# Altium PCB HSB-Version1.PcbDoc
Units mm, origin at the board's own origin, x right, y up, seen from the top; angles counter-clockwise.
Board outline 56.26 x 45.25 mm, 2 copper layers (Top Layer, Bottom Layer); 30 components, 31 nets, 154 pads, 33 vias.
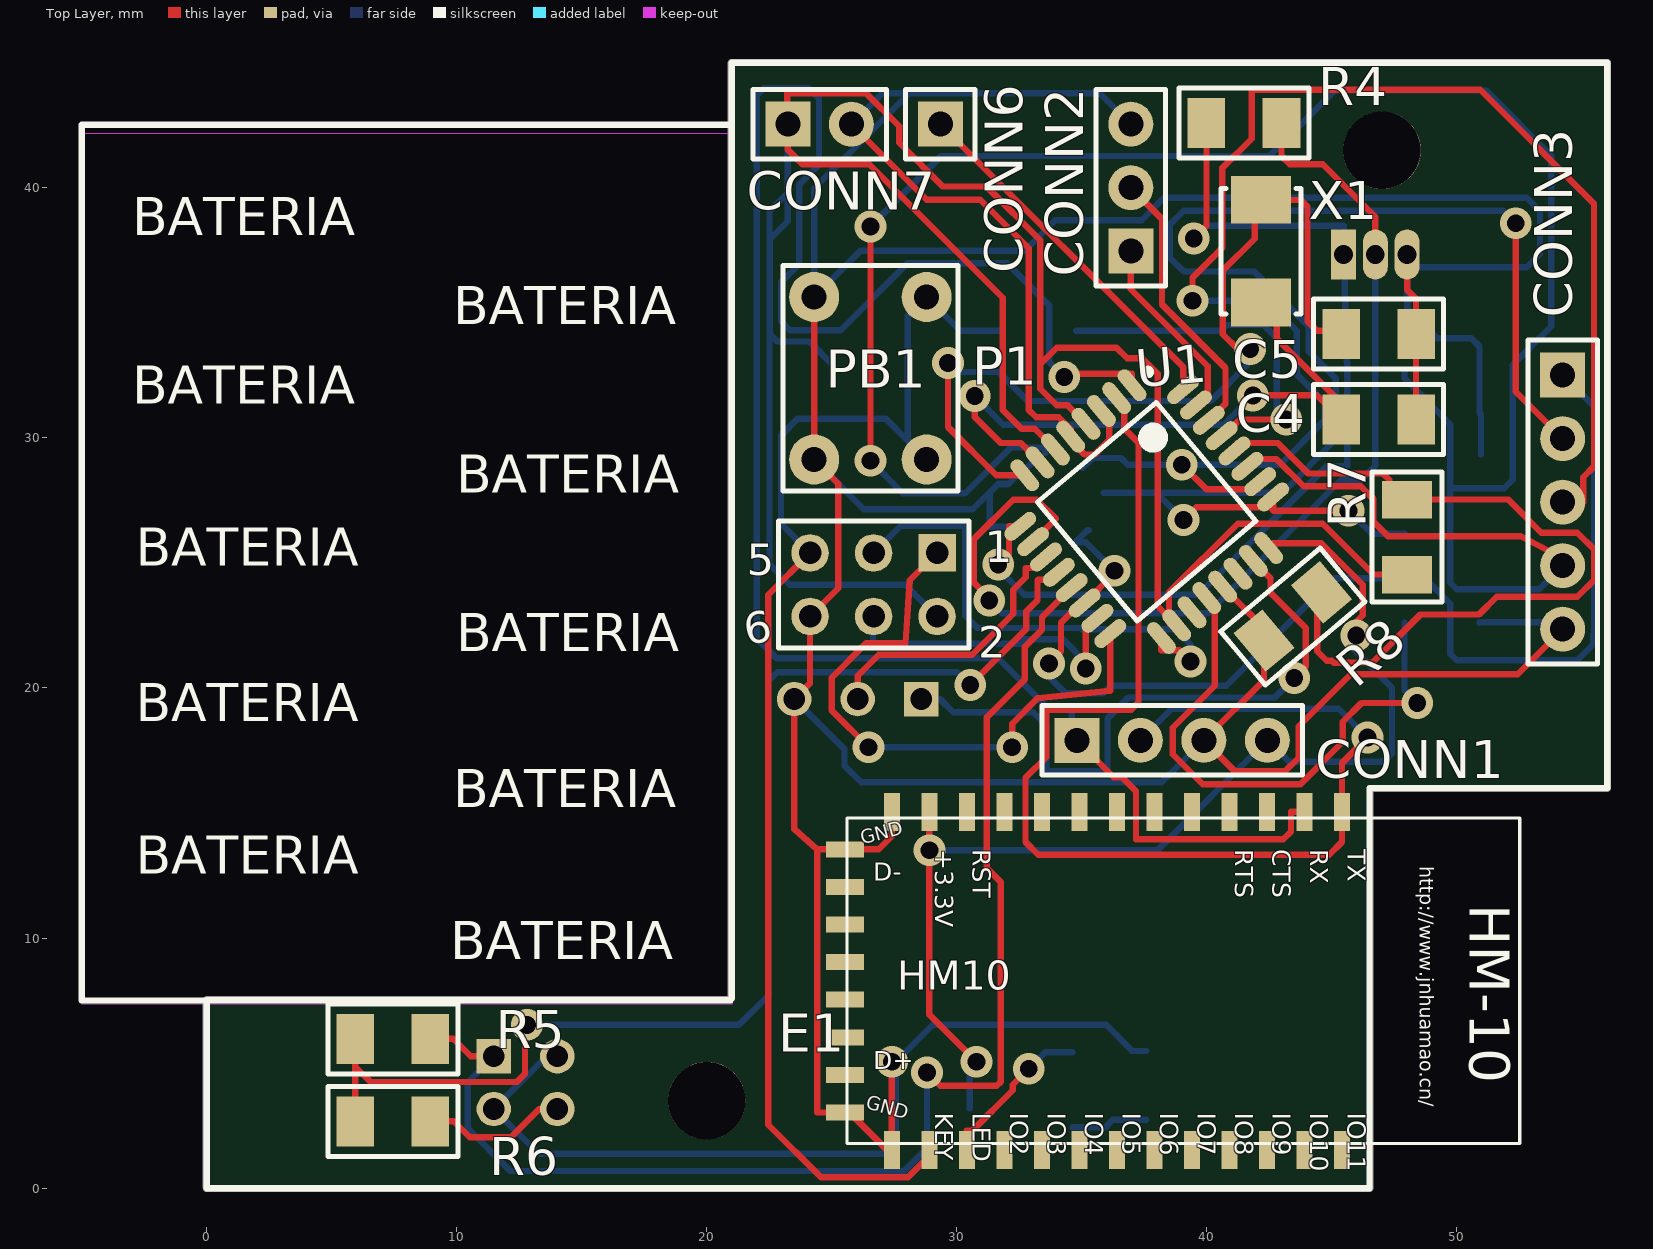
[diagram p0: Top Layer view]
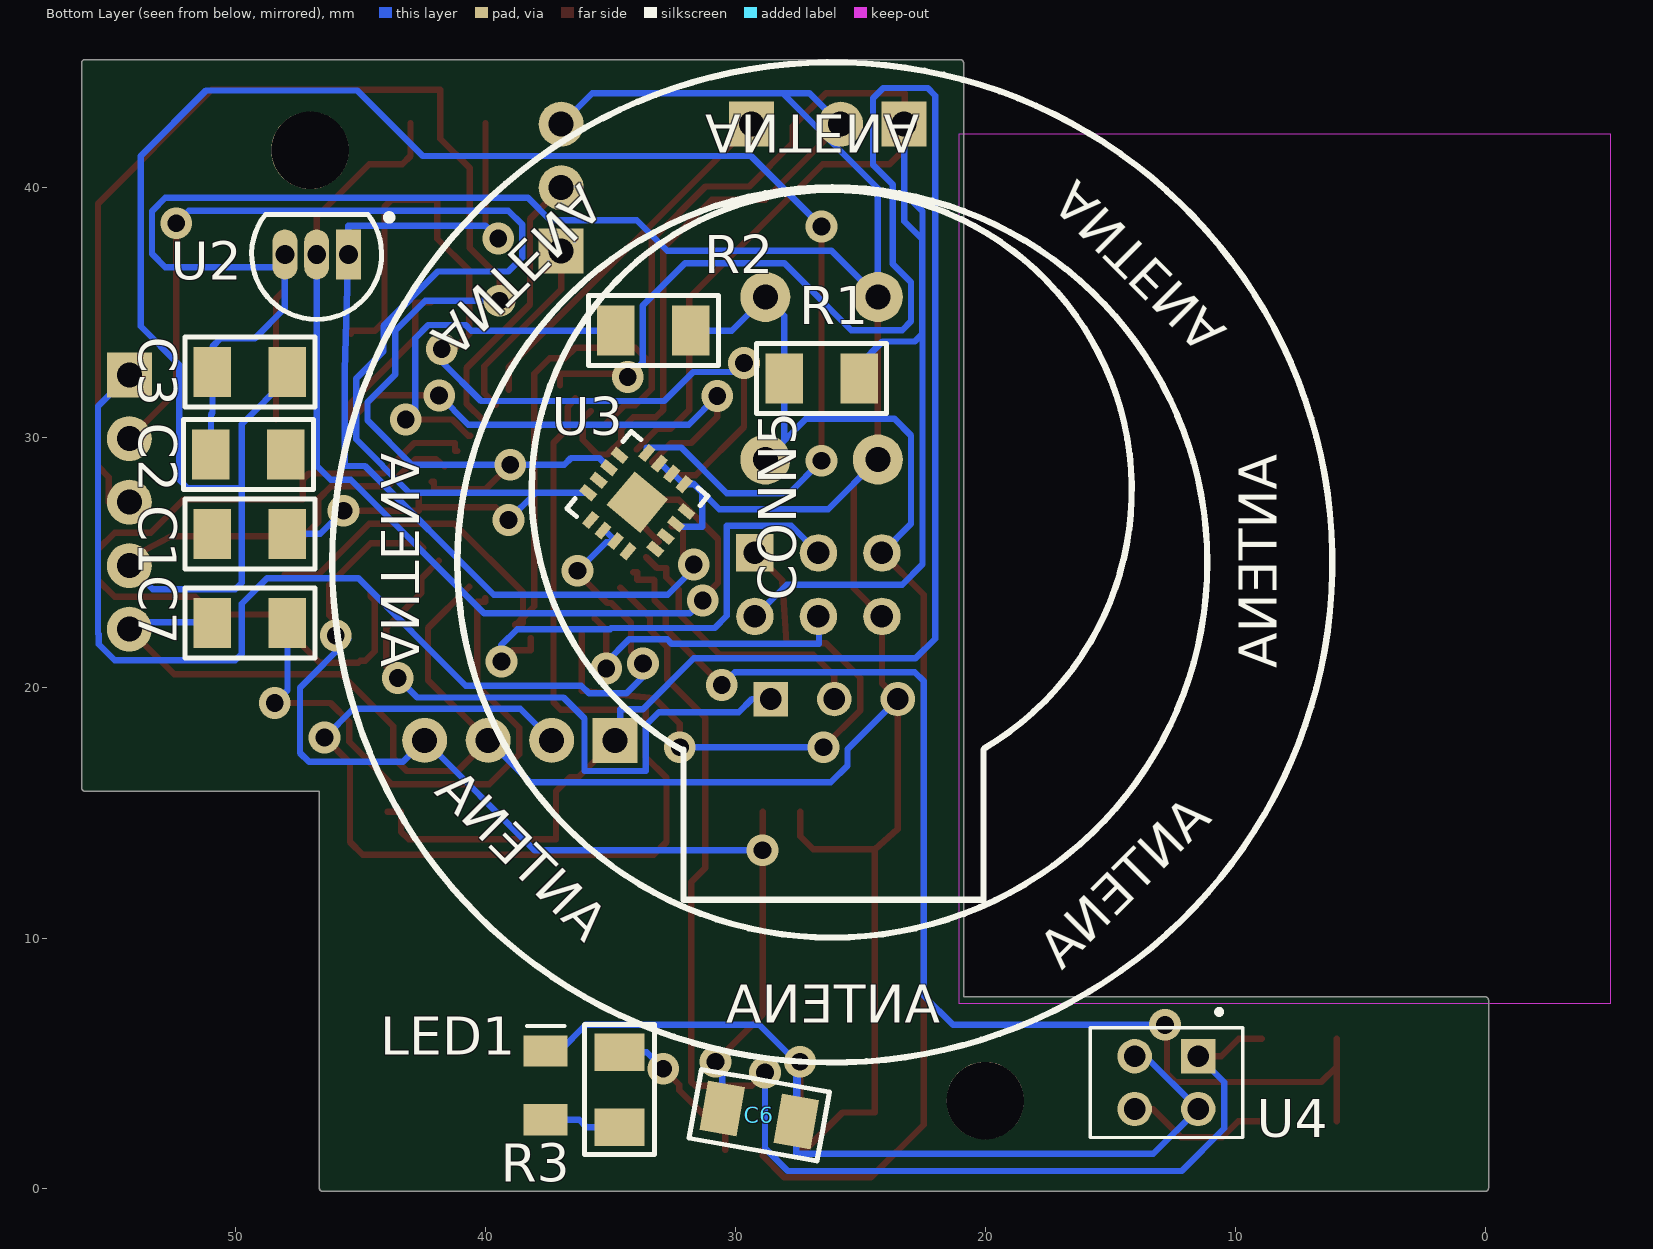
[diagram p1: Bottom Layer view, seen from below]
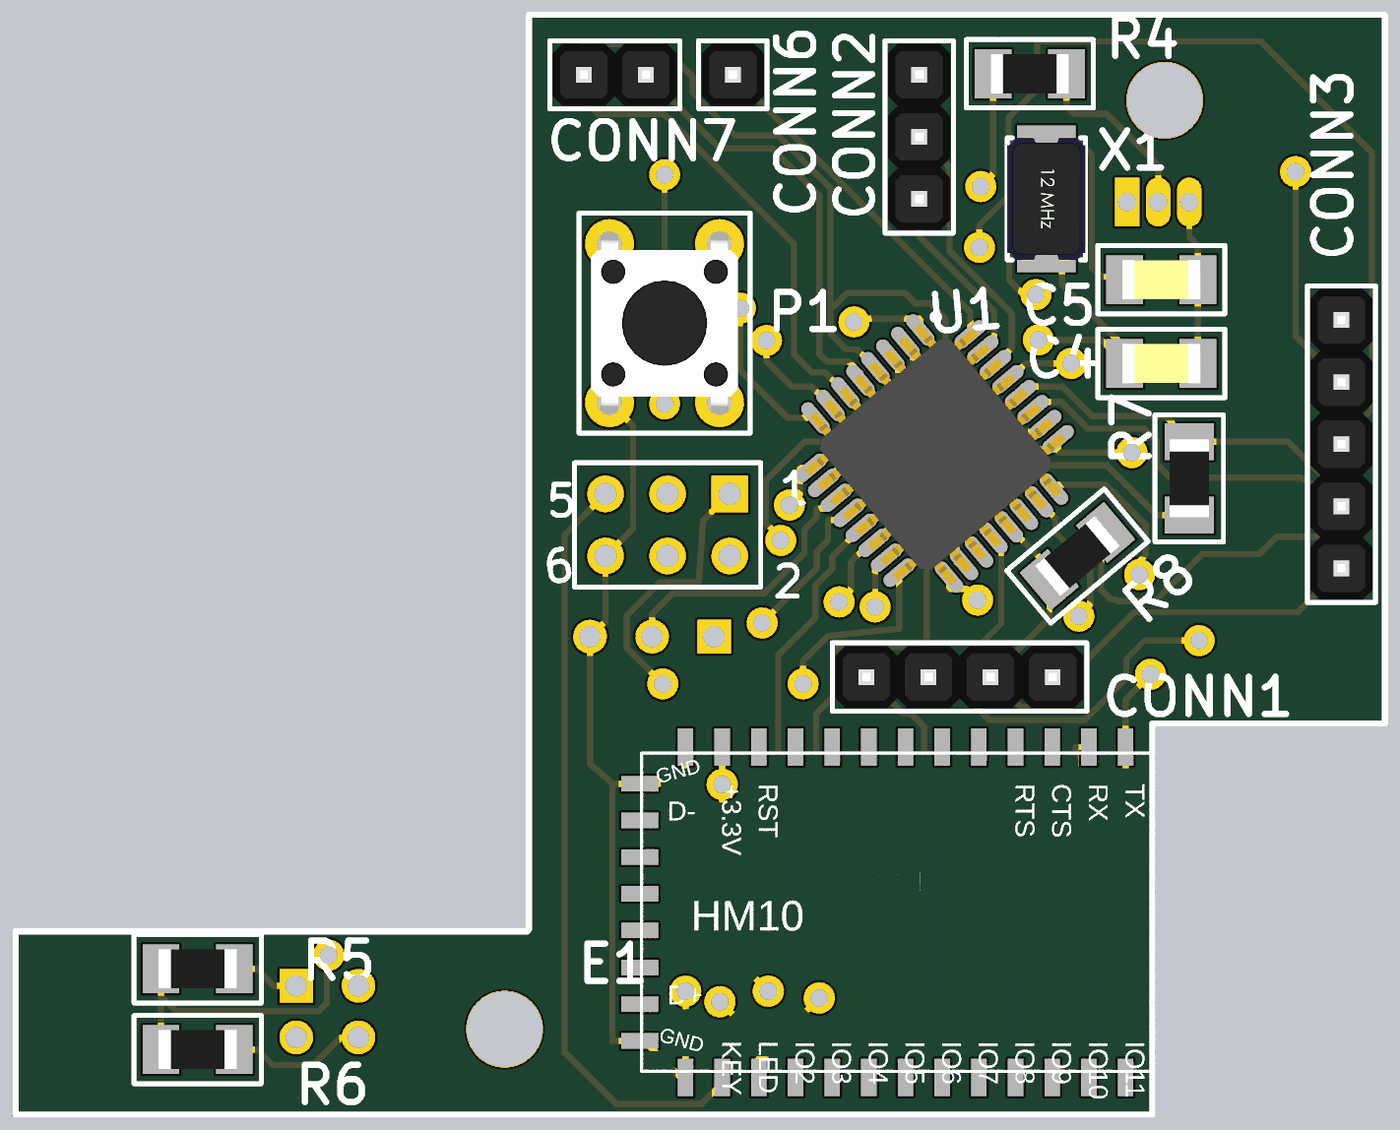
[diagram p2: 3D render of the assembled board from above, using the file's embedded part models]
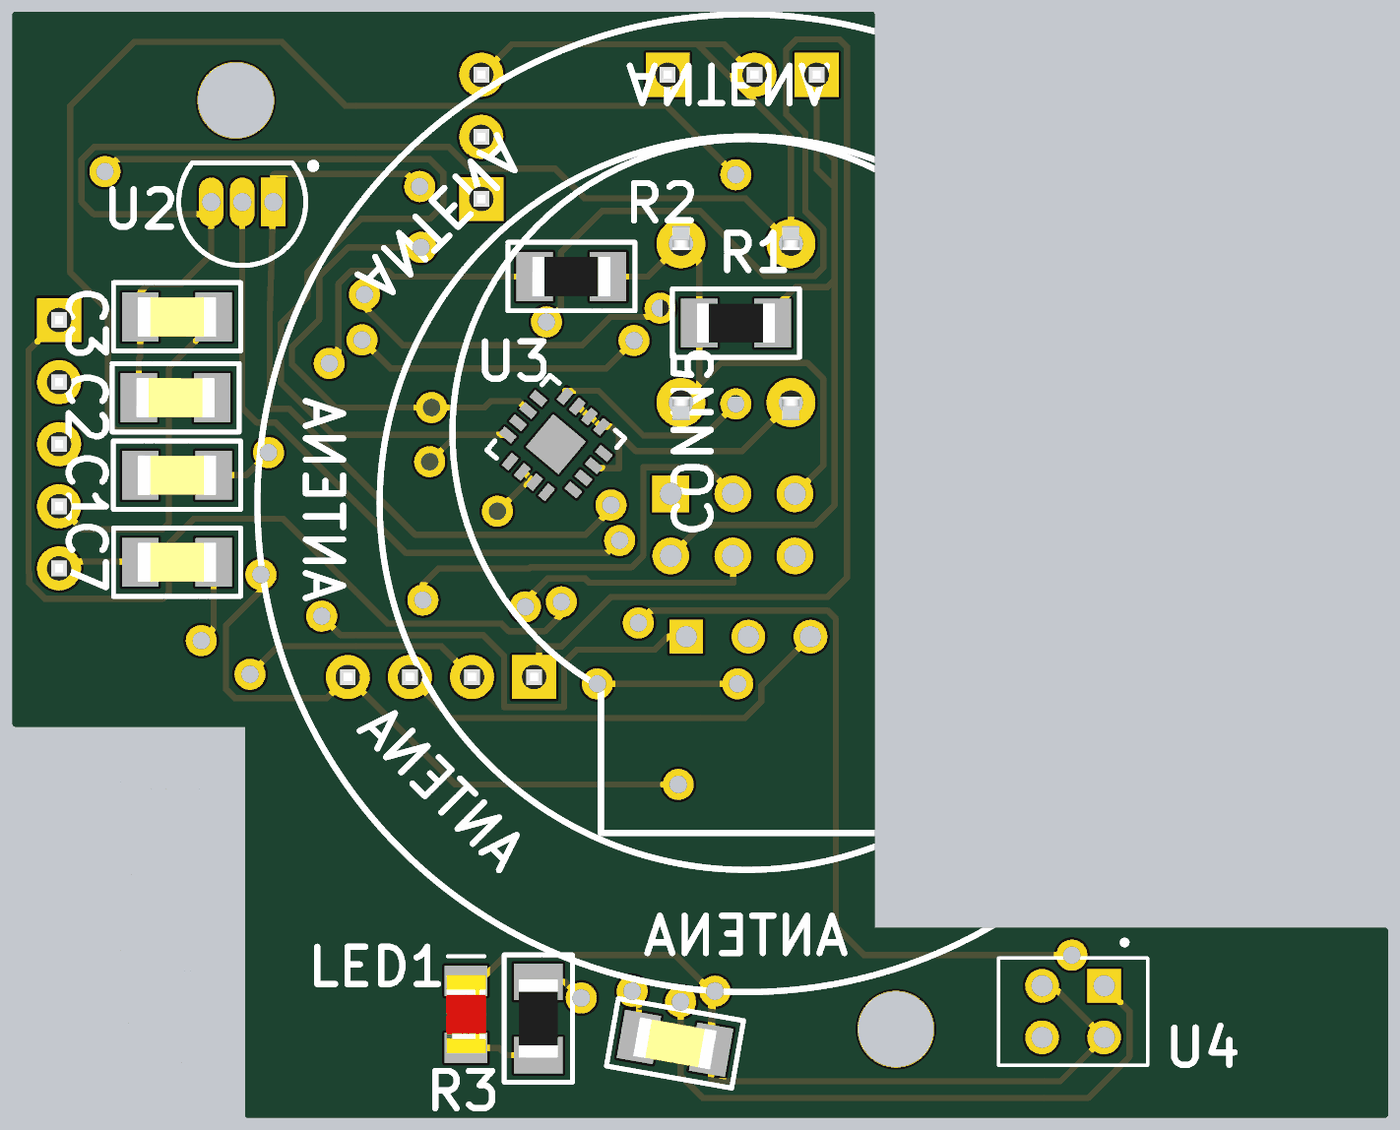
[diagram p3: 3D render of the assembled board from below, using the file's embedded part models]

## Layer stack, top to bottom
Top Solder: solder mask 0.0102, Solder Resist, Dk 3.5
Top Layer: signal copper 0.0356
Dielectric1: dielectric 0.32, FR-4, Dk 4.8
Bottom Layer: signal copper 0.0356
Bottom Solder: solder mask 0.0102, Solder Resist, Dk 3.5

## Board outline
-0.127,0 -0.127,7.519 cw(c0,7.519) 0,7.646 20.868,7.646 20.868,45 cw(c20.995,45) 20.995,45.127 56.007,45.127 cw(c56.007,45) 56.134,45 56.134,16.002 cw(c56.007,16.002) 56.007,15.875 46.627,15.875 46.627,0 cw(c46.5,0) 46.5,-0.127 0,-0.127 cw(c0,0)

## Design rules (kind name [scope] priority, off if disabled: settings)
Clearance [All] p1: gap=0.2 ignorepadtopadclearanceinfootprint=FALSE except(0: Arc-Hole Track-Hole SMDPad-Hole THPad-Hole Via-Hole Fill-Hole Poly-Hole Region-Hole Text-Hole)
PolygonConnect [All] p1: connectstyle=Relief reliefconductorwidth=0.254 reliefentries=4 polygonreliefangle="90 Angle" airgapwidth=0.254
RoutingVias [All] p1: holewidth=0.711 width=1.27 viastyle="Through Hole" minholewidth=0.711 minwidth=1.27 maxholewidth=0.711 maxwidth=1.27
SilkToSilkClearance [All] p1: silktosilkclearance=0.05
SilkToSolderMaskClearance [IsPad] p1: minsilkscreentomaskgap=0.125 clearancetoexposedcopper=TRUE
SolderMaskExpansion [All] p1: expansion=0.102
Width [All] p1: maxlimit=0.254 minlimit=0.254 preferedwidth=0.254
28 further rules are at their usual default settings.

## Classes and differential pairs
component class PPM: CONN5
component class SensorCaida: C1 C2 C3 CONN3 U3
component class Atmega328P: C4 C5 C7 CONN2 CONN6 P1 PB1 R1 R2 R7 R8 U1 X1
component class Temperatura: R4 U2
component class BLE-HM10: C6 CONN1 E1 LED1 R3
component class Proximidad: R5 R6 U4
component class CargaInalambrica: CONN7

## Components (designator, comment, footprint, x,y, rotation, side; value= is the part's Value field where it differs from the comment)
C1 "C" C1206-1.00 49.406,26.162 r0 bottom
C2 "C" C1206-1.00 49.463,29.334 r0 bottom
C3 "C" C1206-1.00 49.403,32.639 r0 bottom
C4 "C1" C1206-1.25 46.863,30.734 r180 top
C5 "C2" C1206-1.25 46.863,34.163 r180 top
C6 "C2" C1206-1.25 29.036,2.921 r10 bottom
C7 "C2" C1206-1.25 49.403,22.606 r180 bottom
CONN1 "Connector" "1x4x2.54 Pin Header TH V" 38.608,17.907 r0 top
CONN2 "Connector" "1x3x2.54 Pin Header TH V" 36.957,40.005 r90 top
CONN3 "Connector" "1x5x2.54 Pin Header TH V" 54.229,27.432 r270 top
CONN5 "Connector" SEN0203 18.796,14.224 r90 bottom
CONN6 "Connector" "1x1x2.54 Pin Header TH V" 29.337,42.545 r90 top
CONN7 "Connector" "1x2x2.54 Pin Header TH V" 24.511,42.545 r0 top
E1 "HM Bluetooth module use TI CC2540 or CC2541, Master and slave roles in one, transmission version and remote control version and PIO state acquisition functions in one, Support the AT command modify module parameters, Convenient and flexible." 26.9X13X2.2_BOARD 45.402,7.544 r270 top
LED1 "LED" SMT1206-LED 37.581,4.108 r90 bottom
P1 "Header 3X2" HDR2X3 29.21,25.4 r180 top
PB1 "Push Button" "Tack Switch 6x6 1mm TH" 26.543,32.385 r270 top
R1 "R" R1206-0.55 26.543,32.385 r0 bottom
R2 "R" R1206-0.55 33.274,34.29 r180 bottom
R3 "R" R1206-0.55 34.624,3.937 r270 bottom
R4 "R" R1206-0.55 41.483,42.587 r180 top
R5 "R" R1206-0.55 7.446,5.969 r180 top
R6 "R" R1206-0.55 7.446,2.667 r180 top
R7 "R" R1206-0.55 48.006,26.035 r270 top
R8 "R" R1206-0.55 43.434,22.86 r40 top
U1 "ATMEGA328P-AU" TQFP80P900X900X120-32N 37.592,27.051 r310 top
U2 "LM35CAZ/NOPB" Z03A 46.736,37.338 r90 bottom
U3 "ADXL335" *LFCSP-16 33.909,27.432 r40 bottom
U4 "QRD1114" *ONS_QRD1114 12.653,4.318 r270 bottom
X1 "XTAL" 2-SMD 42.164,37.465 r270 top

## Footprints (in the part's own frame and the unit in brackets; to place one, negate y for a bottom-side part, rotate by r counter-clockwise, add the part's x,y. Pads: shape width x height; smd on the part's side, far side on the other; paste and mask are expansions set on the pad)
"1x1x2.54 Pin Header TH V" [mm] "1x1x2.54 Pin Header TH V"
  rect 1.8x1.8 hole 1: 1(0,0)
  silkscreen extent -1.4,-1.4 1.4,1.4, body extent -1.27,-1.27 1.27,1.27, height 8.55
"1x2x2.54 Pin Header TH V" [mm] "1x2x2.54 Pin Header TH V"
  rect 1.8x1.8 hole 1: 1(-1.27,0)
  round 1.8 hole 1: 2(1.27,0)
  silkscreen extent -2.67,-1.4 2.67,1.4, body extent -2.54,-1.27 2.54,1.27, height 8.55
"1x3x2.54 Pin Header TH V" [mm] "1x3x2.54 Pin Header TH V"
  rect 1.8x1.8 hole 1: 1(-2.54,0)
  round 1.8 hole 1: 2(0,0) 3(2.54,0)
  silkscreen extent -3.94,-1.4 3.94,1.4, body extent -3.81,-1.27 3.81,1.27, height 8.55
"1x4x2.54 Pin Header TH V" [mm] "1x4x2.54 Pin Header TH V"
  rect 1.8x1.8 hole 1: 1(-3.81,0)
  round 1.8 hole 1: 2(-1.27,0) 3(1.27,0) 4(3.81,0)
  silkscreen extent -5.21,-1.4 5.21,1.4, body extent -5.08,-1.27 5.08,1.27, height 8.55
"1x5x2.54 Pin Header TH V" [mm] "1x5x2.54 Pin Header TH V"
  rect 1.8x1.8 hole 1: 1(-5.08,0)
  round 1.8 hole 1: 2(-2.54,0) 3(0,0) 4(2.54,0) 5(5.08,0)
  silkscreen extent -6.48,-1.4 6.48,1.4, body extent -6.35,-1.27 6.35,1.27, height 8.55
2-SMD [mm] "2-SMD"
  rect 1.9x2.4 smd: 1(-2.05,0) 2(2.05,0)
  silkscreen extent -2.5,-1.6 2.5,1.6, body extent -2.51,-1.6 2.51,1.6, height 1.05
26.9X13X2.2_BOARD [mil]
  rect 60x25 smd: 1(-295.28,0) 2(-295.28,-59.05) 3(-295.28,-118.11) 4(-295.28,-177.16) 5(-295.28,-236.22) 6(-295.28,-295.27) 8(-295.28,-413.39) 9(-295.28,-472.44) 10(-295.28,-531.5) 11(-295.28,-590.55) 12(-295.28,-649.61) 13(-295.28,-708.66) 22(237,-708.66) 23(237,-649.61) 24(237,-590.55) 25(237,-531.5) 26(237,-472.44) 27(237,-413.39) 28(237,-354.33) 29(237,-295.27) 30(237,-236.22) 31(237,-177.16) 32(237,-118.11) 33(237,-59.05) 34(237,0) $7(-295.28,-354.33)
  rect 25x60 smd: 14(-236.22,-782.48) 15(-177.17,-782.48) 16(-118.11,-782.48) 17(-59.06,-782.48) 18(0,-782.48) 19(60,-782.48) 20(119,-782.48) 21(178,-782.48)
  silkscreen extent -285,-780 227,280, body extent -286,-785 226,274, height 61
*LFCSP-16 [mm]
  rect 1.75x1.75 smd: 0(0,0)
  rect 0.65x0.37 smd: 1(-1.75,0.975) 2(-1.75,0.325) 3(-1.75,-0.325) 4(-1.75,-0.975) 9(1.75,-0.975) 10(1.75,-0.325) 11(1.75,0.325) 12(1.75,0.975)
  rect 0.37x0.65 smd: 5(-0.975,-1.75) 6(-0.325,-1.75) 7(0.325,-1.75) 8(0.975,-1.75) 13(0.975,1.75) 14(0.325,1.75) 15(-0.325,1.75) 16(-0.975,1.75)
  silkscreen extent -2,-2 2,2
*ONS_QRD1114 [mm]
  rect 1.378x1.378 hole 0.87: 1(-0.955,1.17)
  round 1.378 hole 0.87: 2(-0.955,-1.37) 3(1.155,-1.37) 4(1.155,1.17)
  silkscreen extent -2.83,-3.15 2.29,2.95
C1206-1.00 [mm] "Capacitor Chip 1206 Height 1.00mm"
  rect 1.5x2 smd: 1(-1.5,0) 2(1.5,0)
  silkscreen extent -2.6,-1.4 2.6,1.4, body extent -1.6,-0.81 1.6,0.81, height 1.01
C1206-1.25 [mm] "Capacitor Chip 1206 Height 1.25mm"
  rect 1.5x2 smd: 1(-1.5,0) 2(1.5,0)
  silkscreen extent -2.6,-1.4 2.6,1.4, body extent -1.6,-0.81 1.6,0.81, height 1.26
HDR2X3 [mm] "Connector; Header; 3x2 Position"
  rect 1.5x1.5 hole 0.9: 1(0,0)
  round 1.5 hole 0.9: 2(0,2.54) 3(2.54,0) 4(2.54,2.54) 5(5.08,0) 6(5.08,2.54)
  silkscreen extent -1.27,-1.27 6.35,3.81
R1206-0.55 [mm] "Resistor Chip 1206 Height 0.55mm"
  rect 1.5x2 smd: 1(-1.5,0) 2(1.5,0)
  silkscreen extent -2.6,-1.4 2.6,1.4, body extent -1.6,-0.8 1.6,0.8, height 0.56
SEN0203 [mil] "Sensor PPM"
  rect 54.25x54.25 hole 34.25: 1(210,385)
  round 54.25 hole 34.25: 2(210,285) 3(210,185)
  silkscreen extent -106,-183 1012,762
SMT1206-LED [mm]
  rect 1.25x1.75 smd: 1(-1.375,0) 2(1.375,0)
  silkscreen extent 2.37,-0.75 2.37,0.75, body extent -1.6,-0.8 1.6,0.8, height 1.78
"Tack Switch 6x6 1mm TH" [mm] "Tack Switch 6x6mm, 1mm button height TH"
  round 2 hole 1: 1(-3.25,2.25) 1(3.25,2.25) 2(-3.25,-2.25) 2(3.25,-2.25)
  silkscreen extent -4.5,-3.5 4.5,3.5, body extent -3.98,-3 3.98,3, height 4.41
TQFP80P900X900X120-32N [mm] "TQFP, 32-Leads, Body 7.00x7.00mm, Pitch 0.80mm, IPC Medium Density"
  oval 1.5x0.55 smd: 1(-4.25,2.8) 2(-4.25,2) 3(-4.25,1.2) 4(-4.25,0.4) 5(-4.25,-0.4) 6(-4.25,-1.2) 7(-4.25,-2) 8(-4.25,-2.8) 17(4.25,-2.8) 18(4.25,-2) 19(4.25,-1.2) 20(4.191,-0.381) 21(4.25,0.4) 22(4.25,1.2) 23(4.25,2) 24(4.25,2.8)
  oval 0.55x1.5 smd: 9(-2.8,-4.25) 10(-2,-4.25) 11(-1.2,-4.25) 12(-0.4,-4.25) 13(0.4,-4.25) 14(1.2,-4.25) 15(2,-4.25) 16(2.8,-4.25) 25(2.8,4.25) 26(2,4.25) 27(1.2,4.25) 28(0.4,4.25) 29(-0.4,4.25) 30(-1.2,4.25) 31(-2,4.25) 32(-2.8,4.25)
  silkscreen extent -4.37,-3.1 3.1,3.75, body extent -4.45,-4.5 4.55,4.5, height 1.6
Z03A [mm] "TO, Flat Index; 3 In-Line, Axial Leads; Body Dia. 5mm; Leads 0.55 x 0.50 mm (max)"
  rect 2x1 hole 0.75: 1(0,-1.27)
  oval 2x1 hole 0.75: 2(0,0) 3(0,1.27)
  silkscreen extent -2.6,-3.02 1.6,2.6, body extent -2.6,-2.61 1.6,2.61, height 5.2

## Part data
C1 C2 C3: "Capacitor, generic"
C4 C5 C6 C7: library part C, "Capacitor, generic"
CONN1: library part "Header 1x4"
CONN2 CONN5: library part "Header 1x3"
CONN3: library part "Header 1x5"
CONN6: library part "Header 1x1"
CONN7: library part "Header 1x2"
E1: library part HM-10-BOARD
LED1: "*"
P1: "Header, 3-Pin, Dual row"
R1 R2 R3 R4 R5 R6 R7 R8: "Resistor, generic"
U1: "Microchip Technology ATMEGA328P-AN, 8bit AVR Microcontroller, 20MHz, 32 kB Flash, 32-Pin TQFP"
U2: "Precision Centigrade Temperature Sensor, 3-pin TO-92, Pb-Free"
U3: "Acelerómetro X, Y, Eje Z ± 3g 1.6kHz _X, Y_, 550Hz _Z_ 16-LFCSP-LQ _4x4_"
U4: "Sensor óptico reflectante 0.050 _1.27 mm_ radial - 4 conductores"
X1: "Crystal, Generic"

## Free pads (board coordinates)
  round 3.1 hole 3.1: 0(20,3.5) 1(47,41.5)

## Via types
v1: diameter 1.27, hole 0.711, Top Layer to Bottom Layer, 33 vias

## Nets (pads, with @x,y where several pads share a name; then routed paths per layer and width w, separated by ;. In a path a pad name is that pad's centre, name@x,y a point inside that pad or via, vN(x,y) a via of type N, cw(c..) or ccw(c..) an arc to the next point about the centre after c; other vN are vias at no path point)
3.3V: CONN7.1 P1.2 R1.1 R7.2 U1.4 U1.6 U1.18 | length 105.7
  Top Layer w0.254: U1.6 33.109,30.368 32.584,30.368 31.836,31.115 31.836,35.604 26.496,40.945 23.829,40.945 23.241,41.533 CONN7.1 23.219,42.545 23.219,43.79 26.369,43.79 27.69,42.469 27.69,41.801 29.44,40.051 31.186,40.051 33.329,37.909 33.329,32.949 ; U1.4 34.423,31.307 33.989,31.307 33.329,31.967 33.329,32.949 ; R7.2 46.666,24.535 44.632,26.568 41.228,26.568 38.485,23.825 U1.18@38.485,22.817 ; 33.329,32.949 33.989,33.609 36.384,33.609 36.808,33.186 37.414,33.186 38.028,32.572 38.028,23.274 U1.18@38.485,22.817 ; U1.18@38.485,22.817 38.485,22.606 38.536,22.555 U1.18@38.746,22.555 ; U1.18@38.485,22.817 U1.18@38.746,22.555 ; U1.18@38.746,22.555 38.792,22.555 U1.18 U1.18@38.746,22.555
  Bottom Layer w0.254: CONN7.1 23.241,39.798 ; R1.1 25.043,32.918 24.108,33.854 22.813,33.854 22.512,34.155 22.512,37.942 23.241,38.671 23.241,39.798 ; P1.2 27.94,24.13 23.321,24.13 22.508,24.943 22.508,39.065 23.241,39.798
A0: CONN5.1 U1.23 | length 25.7
  Top Layer w0.254: U1.23 42.545,24.392 42.545,23.804 43.952,22.396 43.952,20.86 v1(43.489,20.396)
  Bottom Layer w0.254: CONN5.1 29.326,19.558 29.856,19.028 33.048,19.028 33.571,18.505 33.571,16.68 36.025,16.68 36.025,18.778 36.867,19.62 42.712,19.62 v1(43.489,20.396)
A1: C6.2 CONN1.4 E1.12 U1.24 | length 46.9
  Top Layer w0.254: E1.12 v1(28.902,13.513) 28.902,6.941 v1(30.789,5.055) ; U1.24 42.655,25.781 44.577,25.781 46.228,24.13 46.228,22.907 45.466,22.145 45.513,22.098 v1(45.974,22.098)
  Bottom Layer w0.254: v1(28.902,13.513) 38.024,13.513 CONN1.4 43.282,17.043 47.045,17.043 47.4,17.399 47.4,20.015 45.466,21.949 45.615,22.098 v1(45.974,22.098) ; C6.2 30.513,4.779 v1(30.789,5.055)
A2: C1.1 CONN3.2 U1.25 U3.12 | length 58.4
  Top Layer w0.254: v1(39.069,26.716) 39.577,27.224 42.648,27.224 ; U1.25 42.648,27.224 ; v1(45.66,27.089) 42.648,27.089 42.648,27.224 ; v1(52.353,38.583) 52.353,31.848 CONN3.2
  Bottom Layer w0.254: U3.12 37.975,27.81 ; v1(39.069,26.716) 37.975,27.81 ; v1(45.66,27.089) 46.587,26.162 C1.1 ; v1(52.353,38.583) 51.845,39.091 39.069,39.091 38.51,38.532 38.51,37.211 39.069,36.652 41.888,36.652 44.065,34.476 44.065,33.472 45.159,32.379 45.159,29.943 43.026,27.81 37.975,27.81
A3: CONN3.3 U1.26 U3.10 | length 61.2
  Top Layer w0.254: v1(38.993,28.931) 39.983,27.94 42.041,27.94 42.041,28.251 U1.26 ; v1(39.425,35.484) 39.425,36.398 40.618,37.592 40.618,40.792 41.787,41.961 41.787,43.917 50.931,43.917 55.477,39.37 55.477,28.854 55.046,28.423 55.046,27.432 CONN3.3
  Bottom Layer w0.254: U3.10 35.433,29.198 36.564,29.198 36.83,28.932 36.83,28.931 v1(38.993,28.931) 42.93,28.931 44.705,30.705 44.705,31.423 43.59,32.537 43.59,34.29 42.396,35.484 v1(39.425,35.484)
A4: C3.1 CONN3.4 U1.27 U3.8 | length 93.8
  Top Layer w0.254: v1(26.547,29.083) v1(26.547,38.456) ; U1.27 41.971,29.159 42.777,29.159 43.87,28.067 46.156,28.067 46.664,27.559 46.664,26.645 47.241,26.067 52.548,26.067 53.619,25.502 CONN3.4
  Bottom Layer w0.254: v1(26.547,29.083) 27.842,27.788 30.331,27.788 32.16,29.616 33.531,29.616 U3.8 ; v1(26.547,38.456) 29.366,41.275 42.498,41.275 45.114,43.891 51.159,43.891 53.776,41.275 53.776,34.468 52.226,32.918 52.226,28.321 51.896,27.991 49.737,27.991 ; C3.1 47.903,32.385 49.737,30.551 49.737,27.991 ; CONN3.4 53.289,23.952 49.991,23.952 49.737,24.206 49.737,27.991
A5: R7.1 R8.2 U1.28 | length 33.2
  Top Layer w0.254: U1.28 41.203,29.476 41.203,29.794 42.829,29.794 44.048,28.575 47.045,28.575 47.299,28.321 47.299,27.535 R7.1 52.047,27.535 53.377,26.205 54.817,26.205 55.477,25.545 55.477,24.308 54.817,23.647 51.591,23.647 50.88,22.936 48.543,22.936 46.616,21.009 45.068,21.009 44.995,21.082 44.787,21.082 44.406,21.463 44.406,23.496 44.583,23.673 R8.2
AREF: C7.2 U1.20 | length 22.8
  Top Layer w0.254: U1.20 39.994,23.444 40.314,23.444 40.314,20.091 38.637,18.415 38.637,17.348 39.831,16.154 43.743,16.154 45.432,17.843 45.432,18.648 46.181,19.397 v1(48.411,19.397)
  Bottom Layer w0.254: C7.2 47.903,19.905 v1(48.411,19.397)
C_BAT: CONN6.1 U1.32 | length 14.6
  Top Layer w0.254: CONN6.1 39.048,32.834 U1.32
D0: CONN2.2 U1.30 | length 11.1
  Top Layer w0.254: CONN2.2 38.205,38.757 38.205,35.336 40.745,32.796 40.745,31.371 U1.30
D1: CONN2.1 U1.31 | length 7.6
  Top Layer w0.254: CONN2.1 36.957,35.943 40.034,32.865 40.034,31.787 U1.31
D3: CONN1.1 E1.2 U1.1 | length 81
  Top Layer w0.254: v1(34.294,32.436) 34.421,32.563 37.005,32.563 U1.1 ; CONN1.1 36.271,16.434 36.605,16.434 37.164,15.875 37.164,13.945 43.057,13.945 43.362,14.249 43.362,15.044 E1.2
  Bottom Layer w0.254: v1(34.294,32.436) 33.697,33.033 33.697,35.293 32.008,36.982 28.027,36.982 25.353,34.308 23.321,34.308 22.966,34.663 22.966,36.221 23.702,36.957 23.702,40.132 24.489,40.919 24.489,43.586 24.083,43.993 22.305,43.993 22,43.688 22,21.971 22.788,21.184 31.652,21.184 33.684,19.152 34.599,19.152 34.599,18.106 CONN1.1
D4: CONN1.2 E1.1 U1.2 | length 49.7
  Top Layer w0.254: U1.2 36.698,31.228 36.698,30.378 37.266,29.81 37.266,19.431 36.969,19.134 33.571,19.134 33.571,17.235 32.744,16.408 32.744,13.843 33.252,13.335 44.894,13.335 45.402,13.843 E1.1 45.402,17.001 v1(46.418,18.017)
  Bottom Layer w0.254: CONN1.2 38.597,19.166 45.269,19.166 v1(46.418,18.017)
D5: R4.2 U1.9 U2.1 | length 39.5
  Top Layer w0.254: v1(31.652,24.943) 32.084,25.375 32.084,26.464 U1.9 ; v1(39.475,37.973) 39.983,38.481 R4.2
  Bottom Layer w0.254: v1(31.652,24.943) 31.652,24.765 32.694,23.724 39.647,23.724 44.801,28.877 45.613,28.877 45.613,32.686 U2.1 45.466,38.481 39.983,38.481 v1(39.475,37.973)
D6: R4.1 U1.10 U2.2 | length 42.4
  Top Layer w0.254: v1(31.297,23.495) 31.297,23.597 30.687,24.206 30.687,25.959 32.262,27.534 33.194,27.534 33.964,26.764 U1.10 ; R4.1 42.983,41.275 43.313,40.945 44.632,40.945 46.736,38.84 U2.2
  Bottom Layer w0.254: v1(31.297,23.495) 31.805,22.987 40.041,22.987 45.378,28.324 46.166,28.324 46.736,28.894 U2.2
D7: CONN5.2 U1.11 | length 11.2
  Top Layer w0.254: CONN5.2 26.035,20.494 26.87,21.329 30.615,21.329 32.259,22.973 32.259,23.932 32.752,24.426 32.752,24.8 33.126,24.8 U1.11
D8: R5.2 R6.2 U1.12 | length 50.1
  Top Layer w0.254: R6.2 5.946,4.853 ; R5.2 5.946,4.853 ; v1(12.805,6.528) 12.729,6.452 12.729,4.572 12.399,4.242 6.557,4.242 5.946,4.853 ; v1(30.535,20.117) 32.776,22.358 32.776,23.057 33.227,23.508 33.227,24.308 33.252,24.333 33.913,24.333 33.913,24.626 U1.12
  Bottom Layer w0.254: v1(12.805,6.528) 21.289,6.528 22.457,7.696 22.457,20.278 22.813,20.634 30.018,20.634 v1(30.535,20.117)
D9: R5.1 U1.13 U4.1 | length 53.3
  Top Layer w0.254: R5.1 9.859,5.969 10.555,5.273 U4.1 ; v1(28.807,4.623) 29.341,4.089 31.601,4.089 31.754,4.242 31.754,12.243 31.197,12.799 31.197,18.818 32.719,20.34 32.719,21.641 33.405,22.327 33.405,22.835 34.583,24.013 U1.13
  Bottom Layer w0.254: U4.1 10.443,4.233 10.443,2.388 12.145,0.686 27.893,0.686 28.807,1.6 v1(28.807,4.623)
D10: CONN3.1 U1.14 U3.14 U3.15 | length 46.2
  Top Layer w0.254: v1(33.684,20.98) 34.167,21.463 34.167,22.606 34.961,23.4 U1.14 36.3,24.593 v1(36.3,24.689)
  Bottom Layer w0.254: v1(33.684,20.98) 33.684,20.447 34.345,19.787 35.843,19.787 36.148,20.091 40.771,20.091 45.063,24.384 48.721,24.384 49.737,23.368 49.737,21.361 49.991,21.107 54.817,21.107 55.452,21.742 55.452,22.149 55.477,22.174 55.477,31.264 CONN3.1 ; U3.14 35.22,26.3 34.802,25.882 U3.15 34.785,25.832 35.157,25.832 v1(36.3,24.689)
D11: P1.4 U1.15 | length 12.5
  Top Layer w0.254: v1(35.157,20.777) 35.157,22.323 U1.15
  Bottom Layer w0.254: P1.4 26.648,22.86 26.648,21.768 32.544,21.768 32.719,21.942 34.243,21.942 35.157,21.028 v1(35.157,20.777)
D12: P1.1 U1.16 | length 24.3
  Top Layer w0.254: v1(26.471,17.628) 24.997,19.101 24.997,20.411 26.369,21.783 27.944,21.783 28.122,24.312 P1.1 ; v1(32.211,17.628) 32.211,18.572 33.227,19.588 36.136,19.887 U1.16
  Bottom Layer w0.254: v1(26.471,17.628) v1(32.211,17.628)
D13: P1.3 U1.17 | length 19.7
  Top Layer w0.254: U1.17 38.179,21.514 38.891,21.514 v1(39.348,21.057)
  Bottom Layer w0.254: P1.3 27.762,26.492 30.331,26.492 30.331,22.885 30.82,22.396 34.949,22.396 34.993,22.352 38.713,22.352 39.348,21.717 v1(39.348,21.057)
GND: C2.2 C3.2 C4.1 C5.1 C6.1 C7.1 CONN1.3 CONN2.3 CONN3.5 CONN5.3 CONN7.2 E1.13 E1.14 E1.21 E1.22 LED1.2 P1.6 PB1.2 R8.1 U1.3 U1.5 U1.21 U2.3 U3.3 U3.5 U3.6 U3.7 U4.2 U4.4 | length 242.9
  Top Layer w0.254: PB1.2@24.293,35.635 24.293,29.135 25.257,28.171 25.257,23.987 P1.6 24.13,20.193 CONN5.3 23.495,14.355 24.413,13.544 ; CONN7.2 28.797,39.529 30.936,39.529 32.875,37.59 32.875,31.115 33.168,30.822 34.079,30.822 34.554,30.347 U1.5 34.554,29.89 35.107,29.337 35.513,29.337 36.097,29.921 36.097,30.76 U1.3 ; v1(27.402,5.055) E1.22 27.207,1.524 25.709,3.023 E1.21 24.413,3.023 24.413,13.544 ; E1.13 27.402,14.069 26.877,13.544 E1.14 24.413,13.544 ; U1.21 42.285,22.398 R8.1 42.285,20.314 CONN1.3 41.105,16.68 43.133,16.68 43.666,17.213 43.666,18.466 45.756,20.555 52.432,20.555 CONN3.5 ; U2.3 48.006,35.917 48.363,35.56 C5.1 C4.1
  Bottom Layer w0.254: U4.2 13.593,5.273 U4.4 13.274,1.372 27.559,1.372 C6.1 ; CONN5.3 25.509,17.544 25.509,16.891 26.174,16.226 38.197,16.226 CONN1.3 ; PB1.2@24.293,29.135 26.275,27.153 30.636,27.153 31.629,28.146 31.655,28.146 ; CONN7.2 27.026,43.79 28.096,43.79 ; v1(27.402,5.055) v1@27.48,4.976 ; U3.3 32.245,26.441 31.322,26.441 31.322,27.813 31.655,28.146 ; U3.7 32.984,28.982 32.567,28.564 U3.6 32.476,28.564 32.059,28.146 U3.5 ; CONN2.3 35.712,43.79 28.096,43.79 ; LED1.2 37.015,5.483 35.97,6.528 29.032,6.528 v1@27.48,4.976 ; U2.3 U2.3@48.006,36.83 ; C7.1 50.903,22.628 53.953,22.628 CONN3.5 ; C2.2 50.963,30.937 50.903,30.997 C3.2 50.903,33.655 50.573,33.985 49.2,33.985 48.006,35.179 U2.3@48.006,36.83 ; v1@27.48,4.976 27.559,4.898 C6.1 ; v1@27.48,4.976 C6.1 ; 28.096,43.79 24.293,39.986 24.293,35.635 26.148,37.49 32.719,37.49 33.938,38.71 37.397,38.71 38.286,39.599 52.785,39.599 53.318,39.065 53.318,37.363 52.785,36.83 U2.3@48.006,36.83 ; 31.655,28.146 31.678,28.169 32.037,28.169 U3.5 ; 31.655,28.146 U3.5
NET-X1: C4.2 U1.7 X1.2 | length 26.6
  Top Layer w0.254: v1(30.712,31.674) 30.712,30.836 31.754,29.794 32.555,29.794 U1.7 ; v1(41.838,31.699) 44.398,31.699 C4.2 45.363,31.413 42.8,33.976 42.8,35.415 X1.2
  Bottom Layer w0.254: v1(30.712,31.674) 31.855,30.531 40.669,30.531 v1(41.838,31.699)
NET-X2: C5.2 U1.8 X1.1 | length 36
  Top Layer w0.254: v1(29.646,32.998) 29.646,30.437 31.575,28.507 U1.8 ; v1(41.736,33.553) 41.228,33.553 40.637,34.144 40.637,36.692 41.914,37.969 41.914,39.515 X1.1 43.75,39.515 44.022,39.243 44.022,34.671 44.403,34.29 45.363,34.29 C5.2
  Bottom Layer w0.254: v1(29.646,32.998) 30.008,32.636 31.674,32.636 32.836,31.474 40.164,31.474 41.736,33.045 v1(41.736,33.553)
PINRESET: R2.1 U1.29 | length 14.6
  Top Layer w0.254: U1.29 40.669,30.089 41.317,30.737 v1(43.177,30.737)
  Bottom Layer w0.254: R2.1 40.549,34.29 40.774,34.515 42.269,34.515 42.8,33.985 42.8,31.114 v1(43.177,30.737)
RES1K: R6.1 U4.3 | length 5.8
  Top Layer w0.254: R6.1 9.884,2.667 10.519,2.032 12.17,2.032 13.301,3.163 U4.3
RST_PROG: E1.23 P1.5 PB1.1 R1.2 R2.2 | length 53
  Top Layer w0.254: P1.5 22.457,23.727 22.457,2.54 24.566,0.432 28.045,0.432 28.902,1.288 E1.23
  Bottom Layer w0.254: P1.5 22.965,26.565 22.965,30.099 23.626,30.759 27.169,30.759 28.043,29.885 ; PB1.1@28.793,29.135 28.043,29.885 ; R2.2 30.138,34.29 28.793,35.635 28.043,34.885 R1.2 28.043,29.885
ST: U3.2
VLED: LED1.1 R3.2 | length 3.1
  Bottom Layer w0.254: R3.2 35.945,2.437 36.241,2.733 LED1.1
VRES: E1.24 R3.1 | length 6.4
  Top Layer w0.254: E1.24 30.402,2.306 30.624,2.306 32.231,3.912 32.231,4.135 v1(32.871,4.775)
  Bottom Layer w0.254: v1(32.871,4.775) 33.533,5.437 R3.1
pads on no net: C1.2 C2.1 E1.3 E1.4 E1.5 E1.6 E1.8 E1.9 E1.10 E1.11 E1.15 E1.16 E1.17 E1.18 E1.19 E1.20 E1.25 E1.26 E1.27 E1.28 E1.29 E1.30 E1.31 E1.32 E1.33 E1.34 E1.$7 U1.19 U1.22 U3.0 U3.1 U3.4 U3.9 U3.11 U3.13 U3.16

## Keep-outs
Keep-Out Layer:
  rectangle: -5,7.366 21.035,42.164

## Silkscreen, mask and mechanical layers (free items; w line width, h text height)
Top Overlay:
  lines w0.254: -5,7.5 20.934,7.5 ; -5,7.519 -5,42.519 20.995,42.519 ; 46.5,16.002 46.5,0 0,0 0,2.185 0,7.519 20.934,7.519 20.995,7.58 20.995,45 56.007,45 56.007,16.002 46.562,16.002
  text "BATERIA" at -2.968,38.1 h1.52
  text "BATERIA" at 9.859,34.544 h1.52
  text "BATERIA" at -2.968,31.369 h1.52
  text "BATERIA" at 9.986,27.813 h1.52
  text "BATERIA" at -2.841,24.892 h1.52
  text "BATERIA" at 9.986,21.463 h1.52
  text "BATERIA" at -2.841,18.669 h1.52
  text "BATERIA" at 9.859,15.24 h1.52
  text "BATERIA" at -2.841,12.573 h1.52
  text "BATERIA" at 9.732,9.144 h1.52
Bottom Overlay:
  circle w0.254: c26.115,25.019 r15
  circle w0.254: c26.115,25.019 r20
  text "ANTENA" at 31.195,42.926 h1.52 r180
  text "ANTENA" at 16.336,40.386 h1.52 r225
  text "ANTENA" at 42.244,34.163 h1.52 r135
  text "ANTENA" at 8.335,29.337 h1.52 r270
  text "ANTENA" at 44.149,20.828 h1.52 r90
  text "ANTENA" at 10.875,14.732 h1.52 r315
  text "ANTENA" at 36.021,9.779 h1.52 r45
  text "ANTENA" at 21.797,6.604 h1.52

## Dimensions
0,2.185 to 56.007,16.002 on Mechanical 15
0,0 to -5,7.5 on Mechanical 15
0,0 to 20.995,45 on Mechanical 15
-4.959,29.734 to 21.036,29.734 on Mechanical 15
-5,42.519 to -5,7.519 on Mechanical 15
47,41.5 to 56.007,45 on Mechanical 15
47,41.5 to 56.007,45 on Mechanical 15
46.5,0 to 56.007,16.002 on Mechanical 15
56.007,16.002 to 56.007,45 on Mechanical 15
20,3.5 to 46.5,0 on Mechanical 15
20,3.5 to 0,0 on Mechanical 15
20,3.5 to 0,2.185 on Mechanical 15

## Text inside footprints (layer, text, board x,y; h text height)
E1: Top Overlay "http://www.jnhuamao.cn/" at 48.323,12.878 h0.94 r270; Top Overlay "TX" at 45.402,13.544 h1.26 r270; Top Overlay "RX" at 43.902,13.544 h1.26 r270; Top Overlay "CTS" at 42.402,13.544 h1.26 r270; Top Overlay "RTS" at 40.902,13.544 h1.26 r270; Top Overlay "RST" at 30.402,13.544 h1.26 r270; Top Overlay "+3.3V" at 28.902,13.544 h1.26 r270; Top Overlay "GND" at 26.277,13.544 h0.94 r15; Top Overlay "D-" at 26.652,12.044 h1.26; Top Overlay "D+" at 26.652,4.521 h1.26; Top Overlay "GND" at 26.277,3.023 h0.94 r345; Top Overlay "KEY" at 28.902,3.023 h1.26 r270; Top Overlay "LED" at 30.402,3.023 h1.26 r270; Top Overlay "IO2" at 31.902,3.023 h1.26 r270; Top Overlay "IO3" at 33.402,3.023 h1.26 r270; Top Overlay "IO4" at 34.902,3.023 h1.26 r270; Top Overlay "IO5" at 36.402,3.023 h1.26 r270; Top Overlay "IO6" at 37.902,3.023 h1.26 r270; Top Overlay "IO7" at 39.402,3.023 h1.26 r270; Top Overlay "IO8" at 40.902,3.023 h1.26 r270; Top Overlay "IO9" at 42.402,3.023 h1.26 r270; Top Overlay "IO10" at 43.902,3.023 h1.26 r270; Top Overlay "IO11" at 45.402,3.023 h1.26 r270; Top Overlay "HM-10" at 49.974,11.354 h2.76 r270; Top Overlay "HM10" at 27.622,7.544 h1.97
P1: Top Overlay "1" at 31.115,25.019 h1.27; Top Overlay "2" at 30.861,21.209 h1.27; Top Overlay "5" at 21.59,24.511 h1.27; Top Overlay "6" at 21.59,21.717 h1.27 r10